# EAGLE board Sensoray_Breakout_25 (EAGLE 7.1.0)
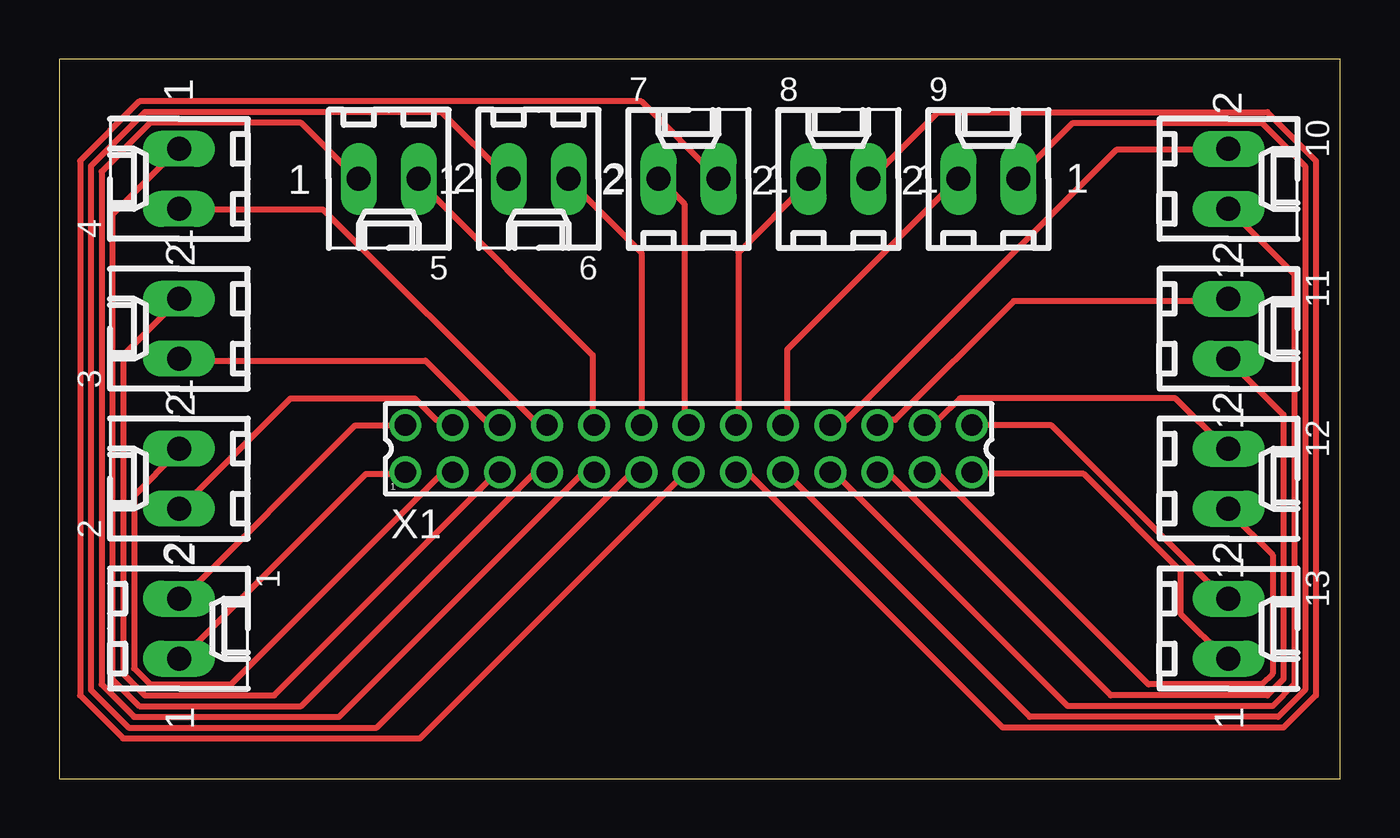
[diagram p0: board, top side]

Size 54.28 x 30.47 mm. Coordinates in mm from the lower left corner, seen from the top.
Outline: 0,0 54.28,0 54.28,30.47 0,30.47 0,0
Copper layers (1*16): Top 0.0178mm / dielectric 59mil / Bottom 0.0178mm
Design rules "epl-lpkf": minimum track width 8mil, minimum drill 0.35mm, track to track 8mil, track to pad 8mil, pad to pad 8mil, via to via 8mil, smd to smd 8mil, copper to edge 15mil, drill to drill 15mil, minimum pad ring 8mil, minimum via ring 8mil, stop-mask expansion 3mil, vias tented up to drill 0mil, thermal gap 10mil

## Footprints (pad centres in the part's own frame; a part is rotated, then mirrored left to right if it is on the bottom)
6410-02 = drill 1.016 long: 1 1.27,0; 2 -1.27,0
87758-2616 = drill 0.9 pad 1.27: 1 -12,-1; 2 -12,1; 3 -10,-1; 4 -10,1; 5 -8,-1; 6 -8,1; 7 -6,-1; 8 -6,1; 9 -4,-1; 10 -4,1; 11 -2,-1; 12 -2,1; 13 0,-1; 14 0,1; 15 2,-1; 16 2,1; 17 4,-1; 18 4,1; 19 6,-1; 20 6,1; 21 8,-1; 22 8,1; 23 10,-1; 24 10,1; 25 12,-1; 26 12,1

## Placement (x,y rotation side)
1  22-27-2021-02  [6410-02]  5.08,6.35 270 top
2  22-27-2021-02  [6410-02]  5.08,12.7 90 top
3  22-27-2021-02  [6410-02]  5.08,19.05 90 top
4  22-27-2021-02  [6410-02]  5.08,25.4 90 top
5  22-27-2021-02  [6410-02]  13.97,25.4 180 top
6  22-27-2021-02  [6410-02]  20.32,25.4 180 top
7  22-27-2021-02  [6410-02]  26.67,25.4 0 top
8  22-27-2021-02  [6410-02]  33.02,25.4 0 top
9  22-27-2021-02  [6410-02]  39.37,25.4 0 top
10  22-27-2021-02  [6410-02]  49.53,25.4 270 top
11  22-27-2021-02  [6410-02]  49.53,19.05 270 top
12  22-27-2021-02  [6410-02]  49.53,12.7 270 top
13  22-27-2021-02  [6410-02]  49.53,6.35 270 top
X1  87758-2616  [87758-2616]  26.67,13.97 0 top

## Library data of the parts
1-13 = con-molex; OC_FARNELL: unknown; OC_NEWARK: unknown
X1 = con-molex; MPN: 87758-2616; OC_FARNELL: unknown; OC_NEWARK: 94M1541

## Nets
N$1: 1.1 X1.1
N$2: 1.2 X1.2
N$3: 2.1 X1.3
N$4: 3.1 X1.5
N$5: 4.1 X1.7
N$6: 5.1 X1.9
N$7: 6.1 X1.11
N$8: 7.1 X1.13
N$9: 8.1 X1.15
N$10: 9.1 X1.17
N$11: 10.1 X1.19
N$12: 11.1 X1.21
N$13: 12.1 X1.23
N$14: 13.1 X1.25
N$15: 2.2 X1.4
N$16: 3.2 X1.6
N$17: 4.2 X1.8
N$18: 5.2 X1.10
N$19: 6.2 X1.12
N$20: 7.2 X1.14
N$21: 8.2 X1.16
N$22: 9.2 X1.18
N$23: 10.2 X1.20
N$24: 11.2 X1.22
N$25: 12.2 X1.24
N$26: 13.2 X1.26

## Tracks (layer width: path | path; a pad name or v marks a point on that pad's centre or on a via)
N$1
  Top 0.254: X1.1 14.61,12.9 13.01,12.9 5.23,5.13 1.1
N$2
  Top 0.254: X1.2 14.61,14.96 12.55,14.96 5.23,7.64 1.2
N$3
  Top 0.254: X1.3 16.66,12.9 16.2,12.9 7.29,3.99 3.86,3.99 3.17,4.67 3.17,11.99 5,13.82 2.1
N$4
  Top 0.254: X1.5 18.49,12.9 9.12,3.53 3.63,3.53 2.72,4.45 2.72,17.93 5,20.22 3.1
N$5
  Top 0.254: X1.7 20.55,12.9 20.09,12.9 10.26,3.07 3.4,3.07 2.26,4.22 2.26,23.88 5,26.62 4.1
N$6
  Top 0.254: X1.9 22.61,12.9 22.15,12.9 11.86,2.62 3.17,2.62 1.8,3.99 1.8,25.7 3.86,27.76 10.26,27.76 12.55,25.48 5.1
N$7
  Top 0.254: X1.11 24.66,12.9 24.21,12.9 13.46,2.16 2.95,2.16 1.35,3.76 1.35,25.93 3.63,28.22 16.2,28.22 18.95,25.48 6.1
N$8
  Top 0.254: 7.1 24.66,28.68 3.4,28.68 0.89,26.16 0.89,3.53 2.72,1.7 15.29,1.7 26.49,12.9 X1.13
N$9
  Top 0.254: X1.15 28.78,12.9 29.23,12.9 39.98,2.16 51.87,2.16 53.24,3.53 53.24,26.16 51.18,28.22 37.24,28.22 34.49,25.48 8.1
N$10
  Top 0.254: X1.17 30.84,12.9 41.12,2.62 51.64,2.62 52.78,3.76 52.78,25.93 50.95,27.76 42.95,27.76 40.66,25.48 9.1
N$11
  Top 0.254: X1.19 32.89,12.9 42.72,3.07 51.41,3.07 52.32,3.99 52.32,21.36 49.58,24.11 10.1
N$12
  Top 0.254: X1.21 34.72,12.9 35.18,12.9 44.55,3.53 51.18,3.53 51.87,4.22 51.87,15.42 49.58,17.7 11.1
N$13
  Top 0.254: X1.23 36.78,12.9 37.24,12.9 46.15,3.99 50.95,3.99 51.41,4.45 51.41,9.47 49.58,11.3 12.1
N$14
  Top 0.254: X1.25 38.84,12.9 43.41,12.9 47.52,8.79 47.52,6.96 49.35,5.13 13.1
N$15
  Top 0.254: X1.4 16.66,15.19 15.98,15.19 15.06,16.1 9.8,16.1 5.23,11.53 2.2
N$16
  Top 0.254: X1.6 18.49,15.19 18.03,15.19 15.52,17.7 5.23,17.7 3.2
N$17
  Top 0.254: X1.8 20.55,15.19 20.09,15.19 11.18,24.11 5.23,24.11 4.2
N$18
  Top 0.254: X1.10 22.61,15.19 22.61,17.93 15.29,25.25 5.2
N$19
  Top 0.254: X1.12 24.66,15.19 24.66,22.28 21.69,25.25 6.2
N$20
  Top 0.254: X1.14 26.49,15.19 26.49,24.33 25.58,25.25 7.2
N$21
  Top 0.254: X1.16 28.78,15.19 28.78,22.28 31.75,25.25 8.2
N$22
  Top 0.254: X1.18 30.84,15.19 30.84,18.16 37.92,25.25 9.2
N$23
  Top 0.254: X1.20 32.89,15.19 33.35,15.19 44.78,26.62 49.35,26.62 10.2
N$24
  Top 0.254: X1.22 34.72,15.19 35.41,15.19 40.44,20.22 49.35,20.22 11.2
N$25
  Top 0.254: X1.24 36.78,15.19 37.24,15.19 38.15,16.1 47.3,16.1 49.35,14.05 12.2
N$26
  Top 0.254: X1.26 38.84,14.96 42.04,14.96 49.35,7.64 13.2